# Altium PCB GUAU.PcbDoc
Units mm, origin at the board's own origin, x right, y up, seen from the top; angles counter-clockwise.
Board outline 40 x 20 mm, 4 copper layers (Top Layer, Int1 (GND), Int2 (PWR), Bottom Layer), stack 1.369 mm thick; 48 components, 39 nets, 223 pads, 212 vias.
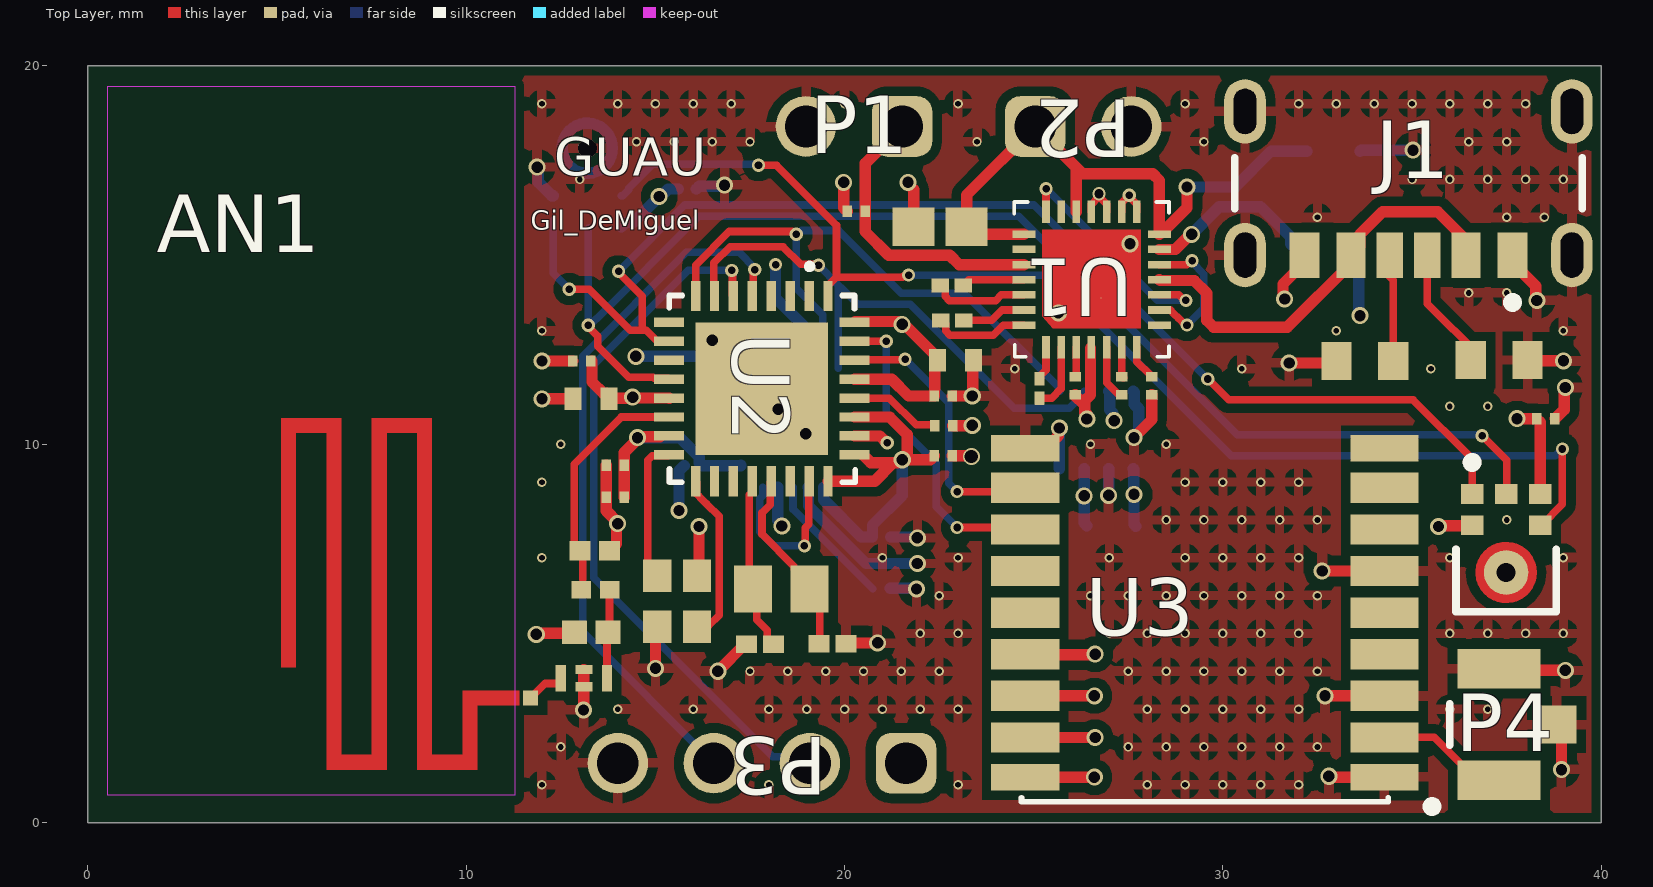
[diagram p0: Top Layer view]
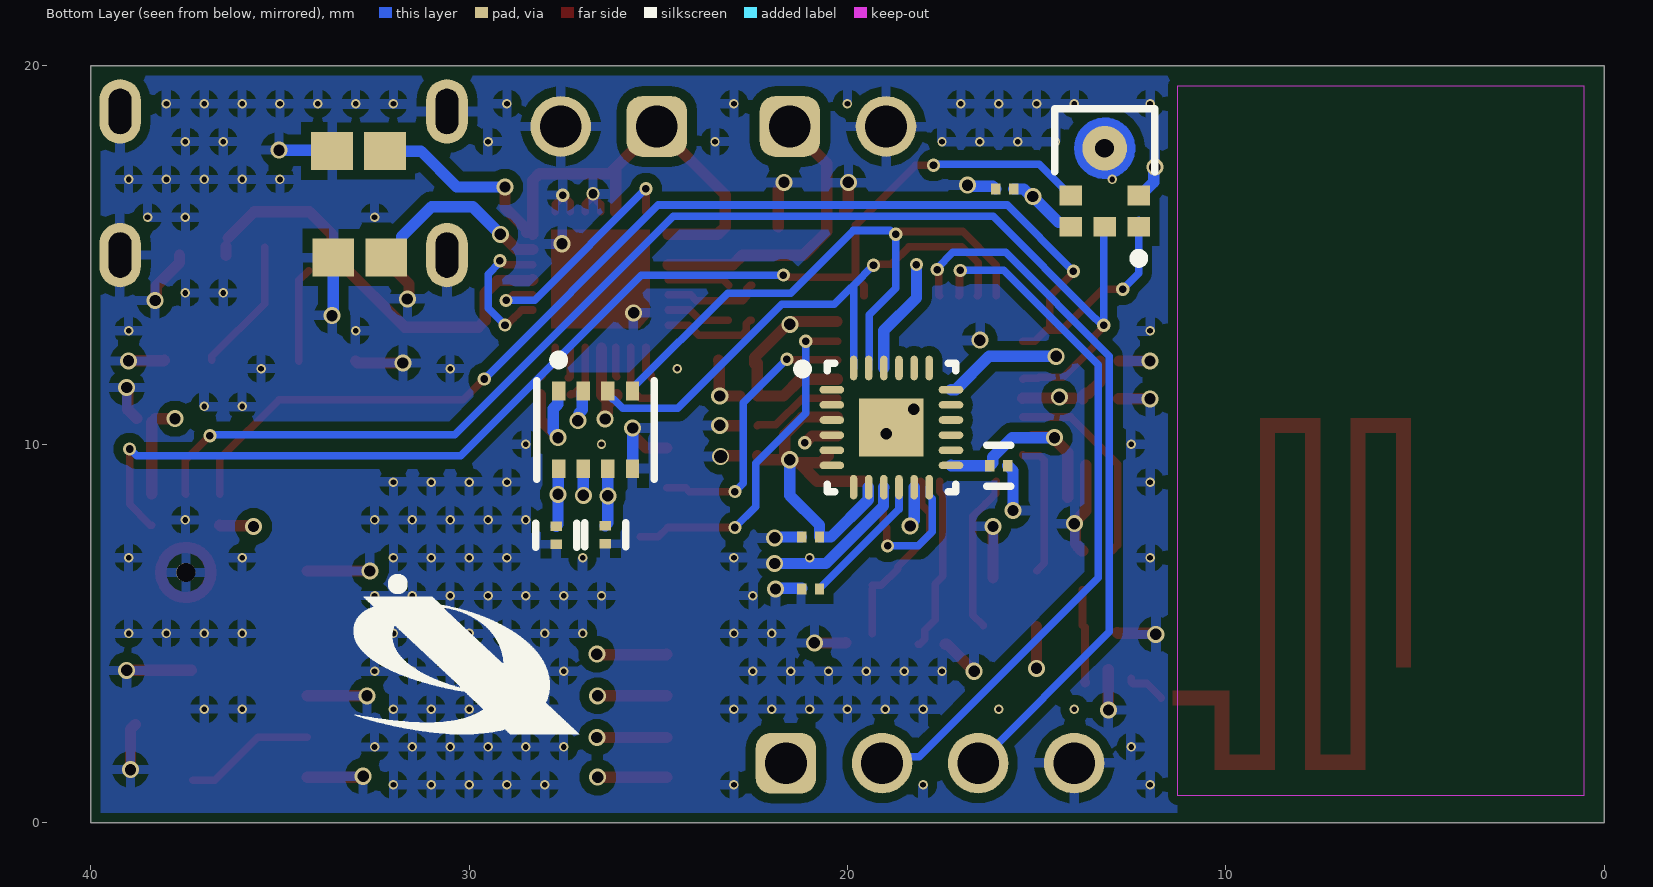
[diagram p1: Bottom Layer view, seen from below]
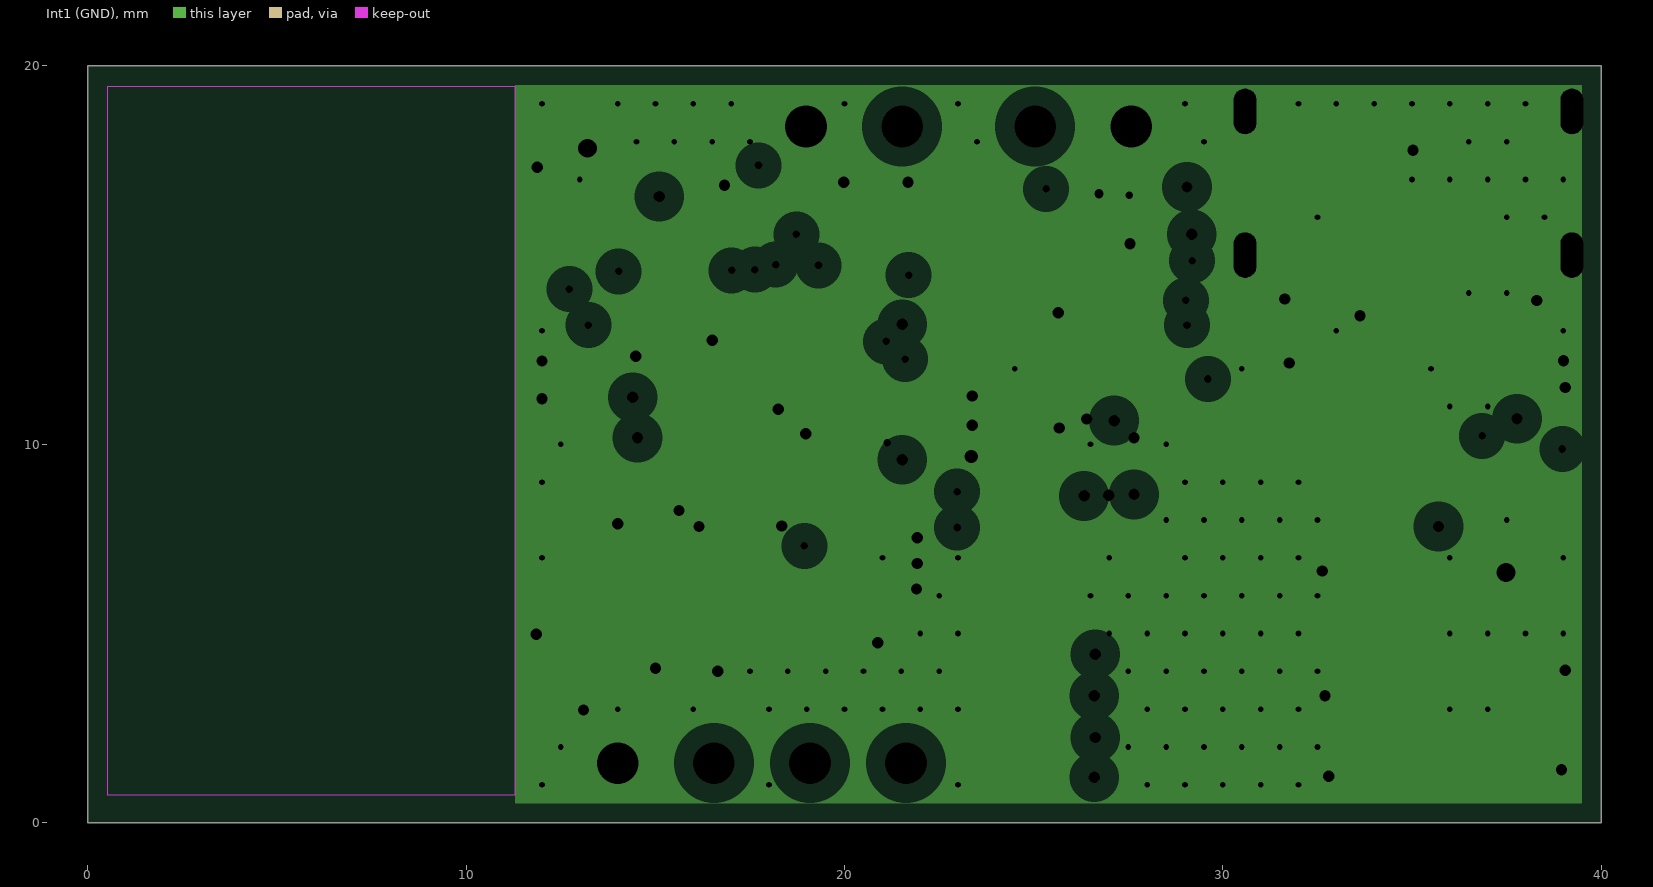
[diagram p2: Int1 (GND), clearances drawn from the general rule]
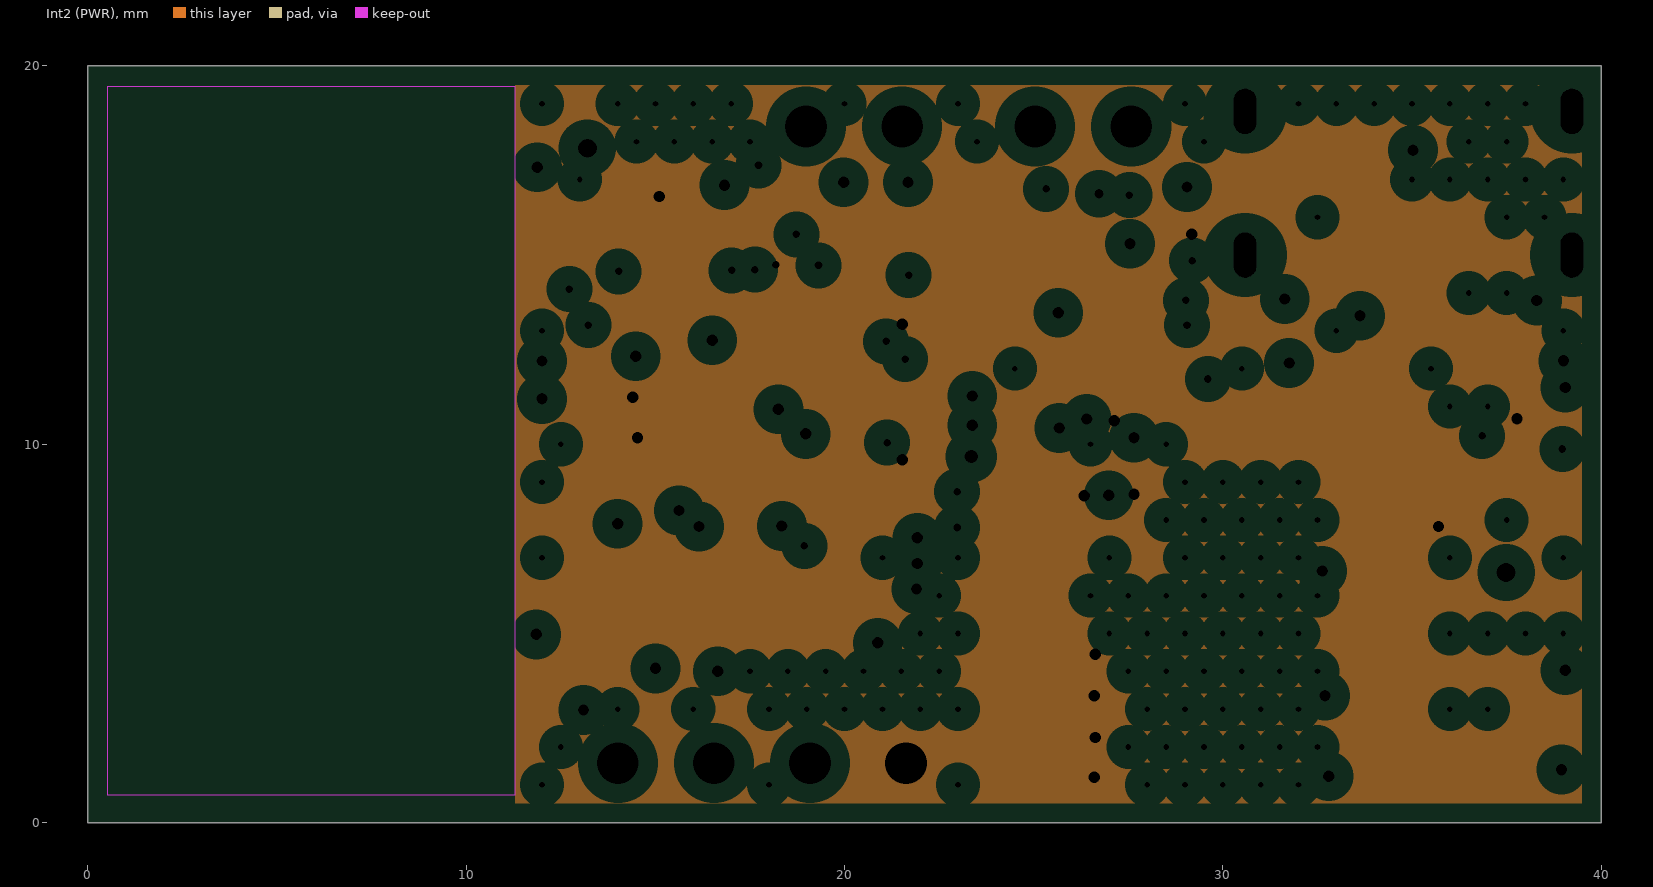
[diagram p3: Int2 (PWR), clearances drawn from the general rule]
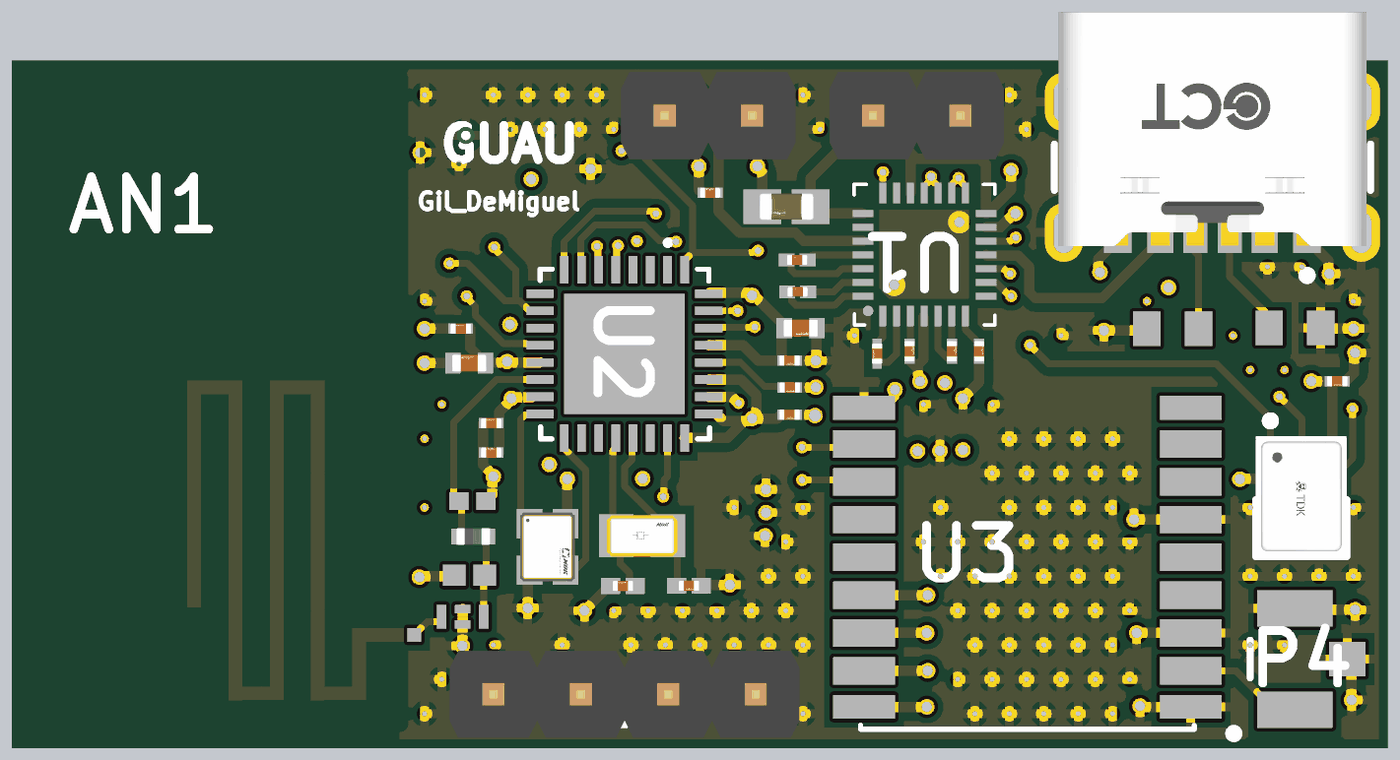
[diagram p4: 3D render of the assembled board from above, using the file's embedded part models]
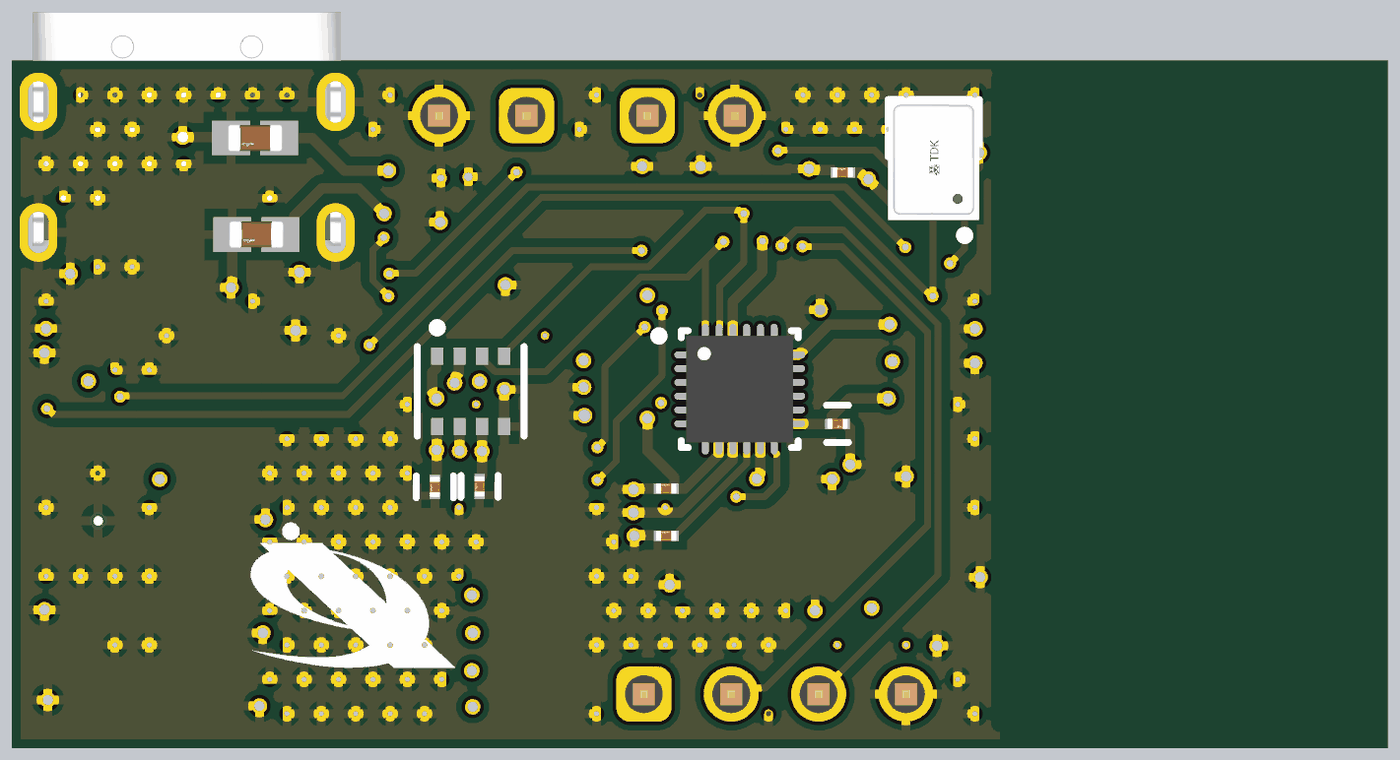
[diagram p5: 3D render of the assembled board from below, using the file's embedded part models]

## Layer stack, top to bottom
Top Solder: solder mask 0.0254, SM-001, Dk 4
Top Layer: signal copper 0.035
Dielectric 1: prepreg 0.1295, PP-017, Dk 4.3
Dielectric 2: prepreg 0.1295, PP-017, Dk 4.3
Int1 (GND): plane copper 0.035, net GND
Dielectric 3: core 0.7112, Core-039, Dk 4.8
Int2 (PWR): plane copper 0.035, net VDD
Dielectric 4: prepreg 0.1295, PP-017, Dk 4.3
Dielectric 5: prepreg 0.1295, PP-017, Dk 4.3
Bottom Layer: signal copper 0.035
Bottom Solder: solder mask 0.0254, SM-001, Dk 4

## Board outline
0,0 40,0 40,20 0,20

## Design rules (kind name [scope] priority, off if disabled: settings)
BoardOutlineClearance [All] p1: gap=0.254 ignorepadtopadclearanceinfootprint=FALSE except(0: Arc-SplitContinuation Track-SplitContinuation SMDPad-SplitContinuation THPad-SplitContinuation Via-SplitContinuation Fill-SplitContinuation Poly-SplitContinuation Region-SplitContinuation Text-SplitContinuation)
Clearance [All] p1: gap=0.254 ignorepadtopadclearanceinfootprint=FALSE except(0.1: Arc-Arc Arc-Track Arc-SMDPad Track-Track Track-SMDPad; 0.15: SMDPad-SMDPad; 0.2: Arc-Via Track-Via Via-Via; 0.28: Arc-THPad Track-THPad; 0.45: THPad-THPad)
HoleSize [All] p1: absolutevalues=TRUE maxlimit=6.3 minlimit=0.15 maxpercent=80.000 minpercent=20.000
HoleToHoleClearance [All] p1: gap=0.2 allowstackedmicrovias=TRUE
MinimumSolderMaskSliver [All] p1: minsoldermaskwidth=0.1
PlaneClearance [All] p1: clearance=0.508
PlaneConnect [All] p1: planeconnectstyle=Relief reliefexpansion=0.508 reliefentries=4 reliefconductorwidth=0.254 reliefairgap=0.254
PolygonConnect [All] p1: connectstyle=Relief reliefconductorwidth=0.254 reliefentries=4 polygonreliefangle="90 Angle" airgapwidth=0.254
RoutingVias [InNetClass('Supply')] p1: holewidth=0.3 width=0.45 viastyle="Through Hole" minholewidth=0.15 minwidth=0.25 maxholewidth=0.711 maxwidth=1.27
SilkToSolderMaskClearance [IsPad] p1: minsilkscreentomaskgap=0.15 clearancetoexposedcopper=TRUE
SolderMaskExpansion [All] p1: expansion=0.102 istentingtop=FALSE
SupplyNets "Schematic Supply Nets_4" [InNet('VDD')] p1: voltage=0.000
SupplyNets "Schematic Supply Nets_3" [InNet('3V7_BATT')] p2: voltage=0.000
SupplyNets "Schematic Supply Nets_2" [InNet('5V_USB')] p3: voltage=0.000
SupplyNets "Schematic Supply Nets_1" [InNet('2V4_PVCell')] p4: voltage=0.000
SupplyNets "Schematic Supply Nets" [InNet('GND')] p5: voltage=0.000
Width [InNetClass('Supply')] p1: maxlimit=0.4 minlimit=0.16 preferedwidth=0.3 minimp=50.000000 maximp=50.000000 favimp=50.000000
24 further rules are at their usual default settings.

## Classes and differential pairs
net class Supply: 2V4_PVCell 3V7_BATT 5V_USB GND VDD
component class U_Power: J1 P1 P2 U1
component class U_MCU: AN1 P3 U2
component class U_GNSS: P4 U3

## Components (designator, comment, footprint, x,y, rotation, side; value= is the part's Value field where it differs from the comment)
AN1 "AN5129" AN5129 11.4,0.594 r90 top
C1 "100n" FP-GRM033-0_03-MFG 20.305,16.156 r180 top
C2 "47u" FP-GRM188-0_2-IPC_B 22.524,15.75 r180 top
C3 "1u" FP-GRM033-0_05-e01_0_2-IPC_B 22.831,14.2 r180 top
C4 "1u" FP-GRM033-0_05-e01_0_2-IPC_B 22.844,13.274 r180 top
C5 "470n" FP-GRM033-0_03-IPC_C 25.157,11.476 r270 top
C6 "100n" FP-GRM033-0_03-MFG 27.329,11.545 r90 top
C7 "100n" FP-GRM033-0_03-MFG 26.099,11.545 r90 top
C8 "100n" FP-GRM033-0_03-MFG 28.123,11.545 r90 top
C9 "47u" FP-GRM188-0_2-IPC_B 32.889,14.94 r0 bottom
C10 "47u" FP-GRM188-0_2-IPC_B 32.925,17.75 r0 bottom
C11 "4.7u" FP-GRM155-0_15-MFG 13.3,11.2 r180 top
C12 "100n" FP-GRM033-0_03-MFG 13.05,12.2 r180 top
C13 "100n" FP-GRM033-0_03-MFG 13.938,8.6 r180 top
C14 "100n" FP-GRM033-0_03-MFG 13.938,9.45 r180 top
C15 "100n" FP-GRM033-0_03-MFG 22.612,9.7 r0 top
C16 "100n" FP-GRM033-0_03-MFG 22.612,11.275 r0 top
C17 "100n" FP-GRM033-0_03-MFG 22.616,10.491 r0 top
C21 "0.8p" CAPC1005X55X25LL05T10 13.394,7.184 r180 top
C22 "0.3p" CAPC1005X55X25NL05T10 13.303,5.026 r0 top
C25 "10p" FP-GRM033-0_03-IPC_A 19.684,4.725 r0 top
C26 "10p" FP-GRM033-0_03-IPC_A 17.767,4.718 r180 top
C27 "4.7u" FP-GRM155-0_15-MFG 22.933,12.219 r0 top
C31 "100n" FP-GRM033-0_03-MFG 27.7,7.6 r270 bottom
C32 "100n" FP-GRM033-0_03-MFG 26.4,7.612 r270 bottom
C33 "100n" FP-GRM033-0_03-MFG 20.975,7.55 r0 bottom
C34 "100n" FP-GRM033-0_03-MFG 15.996,9.433 r180 bottom
C35 "100n" FP-GRM033-0_03-MFG 20.975,6.175 r0 bottom
C36 "100n" FP-GRM033-0_03-MFG 15.841,16.75 r0 bottom
C37 "100n" FP-GRM033-0_03-MFG 38.534,10.672 r0 top
FLT1 "DFL162500LT-5028A1" PCBComponent_1 13.107,3.821 r180 top
J1 "USB4125-GF-A-0190" FP-USB4125-GF-A-0190-MFG 34.905,18 r180 top
L1 "2.7n" FP-LQG15HH_02-IPC_C 13.418,6.155 r0 top
P1 "61300211121" 61300211121 20.25,18.4 r180 top
P2 "61300211121" 61300211121 26.308,18.4 r0 top
P3 "61300411121" 61300411121 17.815,1.57 r180 top
P4 "U.FL-R-SMT-1(01)" HRS-U.FL-R-SMT-3_V 37.3,2.591 r90 top
R1 "5.1k" RESC1608X55X25ML10T15 37.304,12.224 r0 top
R2 "5.1k" RESC1608X55X25ML10T15 33.75,12.2 r180 top
U1 "PMIC" HVQFN-28 25.325,12.565 r90 top
U2 "STM32WB05xZ" STM32WB05XZ 19.561,13.921 r270 top
U3 "MAX-8" "MAX-8 LCC18" 24.775,9.95 r0 top
U4 "BME280" FP-BME280-MFG 26.657,10.379 r90 bottom
U5 "ICM-20948" TDK-QFN-24_L 18.837,10.441 r180 bottom
U6A "ICS-43434" FP-ICS-43434-MFG 37.487,7.321 r270 top
U6B "ICS-43434" FP-ICS-43434-MFG 13.2,17.115 r90 bottom
Y1 "NX2016SA-32MHZ-EXS00A-CS06654" FP-NX2016SA-MFG 15.575,5.85 r270 top
Y2 "NX2012SA-32.768K-STD-MUB-1" FP-NX2012SA-MFG 18.325,6.175 r180 top

## Footprints (in the part's own frame and the unit in brackets; to place one, negate y for a bottom-side part, rotate by r counter-clockwise, add the part's x,y. Pads: shape width x height; smd on the part's side, far side on the other; paste and mask are expansions set on the pad)
61300211121 [mm] "Pin Header, pitch 2.54 mm, THT, Vertical, single row, 2p"
  rrect50% 1.6x1.6 hole 1.1: 1(-1.27,0)
  round 1.6 hole 1.1: 2(1.27,0)
  body extent -2.54,-1.27 2.54,1.27, height 8.57
61300411121 [mm] "Pin Header, pitch 2.54 mm, THT, Vertical, single row, 4p"
  rrect50% 1.6x1.6 hole 1.1: 1(-3.81,0)
  round 1.6 hole 1.1: 2(-1.27,0) 3(1.27,0) 4(3.81,0)
  body extent -5.08,-1.27 5.08,1.27, height 8.57
AN5129 [mm]
  rect 0.4x0.4 smd: 1(2.7,-0.3)
  Top Layer region: 3.5,5.899 10.1,5.899 10.1,6.299 3.5,6.299
  Top Layer region: 9.7,4.7 10.1,4.7 10.1,6.3 9.7,6.3
  Top Layer region: 0.799,4.7 10.099,4.7 10.099,5.1 0.799,5.1
  Top Layer region: 0.8,3.5 1.2,3.5 1.2,5.1 0.8,5.1
  Top Layer region: 0.8,3.499 10.1,3.499 10.1,3.899 0.8,3.899
  Top Layer region: 9.7,2.3 10.1,2.3 10.1,3.9 9.7,3.9
  Top Layer region: 0.799,2.3 10.099,2.3 10.099,2.7 0.799,2.7
  Top Layer region: 0.8,1.1 1.2,1.1 1.2,2.7 0.8,2.7
  Top Layer region: 0.8,1.1 2.9,1.1 2.9,1.5 0.8,1.5
  Top Layer region: 2.499,-0.001 2.899,-0.001 2.899,1.499 2.499,1.499
  Keep-Out Layer region: 0.125,10.875 18.875,10.875 18.875,0.125 0.125,0.125
CAPC1005X55X25LL05T10 [mm] "Chip Capacitor, 2-Leads, Body 1.00x0.50mm, IPC High Density"
  rect 0.56x0.52 smd: 1(-0.39,0) 2(0.39,0)
  body extent -0.53,-0.28 0.53,0.28, height 0.55
CAPC1005X55X25NL05T10 [mm] "Chip Capacitor, 2-Leads, Body 1.00x0.50mm, IPC Medium Density"
  rect 0.66x0.62 smd: 1(-0.44,0) 2(0.44,0)
  body extent -0.53,-0.28 0.53,0.27, height 0.55
FP-BME280-MFG [mm]
  rect 0.5x0.35 smd paste+0 mask+0: 1(1.025,0.975) 2(1.025,0.325) 3(1.025,-0.325) 4(1.025,-0.975) 5(-1.025,-0.975) 6(-1.025,-0.325) 7(-1.025,0.325) 8(-1.025,0.975)
  silkscreen extent -1.3,-1.55 1.97,1.55
FP-GRM033-0_03-IPC_A [mm]
  rect 0.554x0.463 smd paste+0 mask+0: 1(-0.354,0) 2(0.354,0)
  body extent -0.83,-0.43 0.83,0.43, height 0.25
FP-GRM033-0_03-IPC_C [mm]
  rect 0.354x0.263 smd paste+0 mask+0: 1(-0.254,0) 2(0.254,0)
  body extent -0.53,-0.27 0.53,0.27, height 0.25
FP-GRM033-0_03-MFG [mm]
  rect 0.25x0.3 smd paste+0 mask+0: 1(-0.238,0) 2(0.238,0)
  body extent -0.46,-0.27 0.46,0.27, height 0.25
FP-GRM033-0_05-e01_0_2-IPC_B [mm]
  rect 0.461x0.372 smd paste+0 mask+0: 1(-0.306,0) 2(0.306,0)
  body extent -0.69,-0.34 0.69,0.34, height 0.25
FP-GRM155-0_15-MFG [mm]
  rect 0.45x0.6 smd paste+0 mask+0: 1(-0.475,0) 2(0.475,0)
  body extent -0.8,-0.43 0.8,0.43, height 0.25
FP-GRM188-0_2-IPC_B [mm]
  rect 1.105x1.006 smd paste+0 mask+0: 1(-0.701,0) 2(0.701,0)
  body extent -0.8,-0.4 0.8,0.4, height 1
FP-ICS-43434-MFG [mm]
  rect 0.522x0.6 smd paste-1000 mask+0: 1(-1.364,-0.9) 2(-0.542,-0.9) 4(-0.542,0.9) 5(-1.364,0.9) 6(-1.364,0)
  round 1.178 smd paste-1000 mask-1000: 3(0.71,0)
  round 0.5 hole 0.5 unplated paste-2539.97 mask+0: ""(0.71,0)
  Top Layer circle w0.3: c0.71,0 r0.663
  silkscreen extent -2.32,-1.33 1.75,1.33, body extent -1.75,-1.33 1.75,1.33, height 0.98
FP-LQG15HH_02-IPC_C [mm]
  rect 0.515x0.472 smd paste+0 mask+0: 1(-0.379,0) 2(0.379,0)
  body extent -0.74,-0.38 0.74,0.38, height 0.25
FP-NX2012SA-MFG [mm]
  rect 1x1.25 smd paste+0 mask+0: 1(-0.75,0) 2(0.75,0)
  body extent -1.35,-0.72 1.35,0.72, height 0.25
FP-NX2016SA-MFG [mm]
  rect 0.85x0.75 smd paste+0 mask+0: 1(-0.675,-0.525) 2(0.675,-0.525) 3(0.675,0.525) 4(-0.675,0.525)
  body extent -1.2,-1 1.2,1, height 0.25
FP-USB4125-GF-A-0190-MFG [mm]
  rrect100% 1.1x1.7 hole 1.2 slot 0.6 at 0 deg paste-2539.97 mask+0: 1(-4.32,3) 2(4.32,3) 3(-4.32,-0.8) 4(4.32,-0.8)
  rect 0.7x1.2 smd paste+0 mask+0: A5(-0.5,3) B5(0.5,3)
  rect 0.76x1.2 smd paste+0 mask+0: A9(1.52,3) B9(-1.52,3)
  rect 0.8x1.2 smd paste+0 mask+0: A12(2.75,3) B12(-2.75,3)
  silkscreen extent -4.59,0.43 4.59,4.37, body extent -4.97,-3.57 4.97,3.95, height 0.25
HRS-U.FL-R-SMT-3_V [mm] "SMT, 3-Leads, Body 2.6x2.6mm"
  rect 1.05x2.2 smd: 1(-1.475,0) 2(1.475,0)
  rect 1x1.05 smd: 3(0,-1.525)
  silkscreen extent -2.29,1.3 0.55,1.9, body extent -1.3,-1.3 1.3,1.3, height 1.25
HVQFN-28 [mm]
  rect 0.6x0.2 smd mask-2539.97: 1(0,0) 2(0,-0.4) 3(0,-0.8) 4(0,-1.2) 5(0,-1.6) 6(0,-2) 7(0,-2.4) 15(3.581,-2.4) 16(3.581,-2) 17(3.581,-1.6) 18(3.581,-1.2) 19(3.581,-0.8) 20(3.581,-0.4) 21(3.581,0)
  rect 0.2x0.6 smd mask-2539.97: 8(0.584,-2.997) 9(0.984,-2.997) 10(1.384,-2.997) 11(1.784,-2.997) 12(2.184,-2.997) 13(2.584,-2.997) 14(2.984,-2.997) 22(2.984,0.584) 23(2.584,0.584) 24(2.184,0.584) 25(1.784,0.584) 26(1.384,0.584) 27(0.984,0.584) 28(0.584,0.584)
  round 0.025 smd mask+0.2: 29(1.3,-1.45)
  Top Layer region: 0.508,-0.178 0.5,-0.175 0.817,0.106 3.104,0.106 3.104,-2.496 3.1,-2.5 0.5,-2.5
  silkscreen extent -0.25,-3.25 3.84,0.84, body extent -0.21,-3.2 3.78,0.79, height 0.8
"MAX-8 LCC18" [mm]
  rect 1.8x0.7 smd: 1(0,-0.05) 9(0,-8.75) 10(9.5,-8.75) 18(9.5,-0.05)
  rect 1.8x0.8 smd: 2(0,-1.1) 3(0,-2.2) 4(0,-3.3) 5(0,-4.4) 6(0,-5.5) 7(0,-6.6) 8(0,-7.7) 11(9.5,-7.7) 12(9.5,-6.6) 13(9.5,-5.5) 14(9.5,-4.4) 15(9.5,-3.3) 16(9.5,-2.2) 17(9.5,-1.1)
  silkscreen extent -0.1,-9.4 9.6,-9.29, body extent -0.18,-9.4 9.68,0.6, height 2.06
PCBComponent_1 [mm]
  rect 0.275x0.7 smd: 1(-0.613,0) 3(0.613,0)
  rect 0.45x0.245 smd: 2(0,0.228) 4(0,-0.228)
  body extent -0.8,-0.41 0.8,0.41, height 0.36
RESC1608X55X25ML10T15 [mm] "Chip Resistor, 2-Leads, Body 1.60x0.80mm, IPC Low Density"
  rect 0.8x1 smd: 1(-0.75,0) 2(0.75,0)
  body extent -0.85,-0.45 0.85,0.45, height 0.55
STM32WB05XZ [mm]
  rect 0.8x0.25 smd: 1(0,0) 2(0,-0.5) 3(0,-1) 4(0,-1.5) 5(0,-2) 6(0,-2.5) 7(0,-3) 8(0,-3.5) 17(4.9,-3.5) 18(4.9,-3) 19(4.9,-2.5) 20(4.9,-2) 21(4.9,-1.5) 22(4.9,-1) 23(4.9,-0.5) 24(4.9,0)
  rect 0.25x0.8 smd: 9(0.7,-4.2) 10(1.2,-4.2) 11(1.7,-4.2) 12(2.2,-4.2) 13(2.7,-4.2) 14(3.2,-4.2) 15(3.7,-4.2) 16(4.2,-4.2) 25(4.2,0.7) 26(3.7,0.7) 27(3.2,0.7) 28(2.7,0.7) 29(2.2,0.7) 30(1.7,0.7) 31(1.2,0.7) 32(0.7,0.7)
  rect 3.5x3.5 smd: 33(2.45,-1.751)
  silkscreen extent -0.8,-4.2 4.92,0.72, body extent -0.5,-4.7 5.4,1.2, height 0.9
TDK-QFN-24_L [mm] "QFN, 24-Leads, Body 3.10x3.10mm, Pitch 0.40mm, Thermal Pad 1.70x1.54mm, IPC High Density"
  oval 0.65x0.2 smd: 1(-1.575,1) 2(-1.575,0.6) 3(-1.575,0.2) 4(-1.575,-0.2) 5(-1.575,-0.6) 6(-1.575,-1) 13(1.575,-1) 14(1.575,-0.6) 15(1.575,-0.2) 16(1.575,0.2) 17(1.575,0.6) 18(1.575,1)
  oval 0.2x0.65 smd: 7(-1,-1.575) 8(-0.6,-1.575) 9(-0.2,-1.575) 10(0.2,-1.575) 11(0.6,-1.575) 12(1,-1.575) 19(1,1.575) 20(0.6,1.575) 21(0.2,1.575) 22(-0.2,1.575) 23(-0.6,1.575) 24(-1,1.575)
  rect 1.7x1.54 smd: 25(0,0)
  silkscreen extent -2.48,-1.7 1.7,1.7, body extent -1.55,-1.55 1.55,1.55, height 1.05

## Part data
C1 C6 C7 C8 C12 C13 C14 C15 C16 C17 C31 C32 C33 C34 C35 C36 C37: library part CMP-06035-019037-1, "Chip Multilayer Ceramic Capacitors for General Purpose, 0201, 0.10uF, X7S, 22%, 10%, 16V", Capacitance=100nF, Case Code (Imperial)=0201, Case Code (Metric)=0603, Dielectric=X7S, Max Operating Temperature=125°C, Min Operating Temperature=-55°C, Package Quantity=15000, Tolerance=10%, Voltage Rating=16V, Case/Package=0201, Height=0.3mm, Length=0.024inch, Mount="Surface Mount", Packaging="Tape and Reel", Termination=SMD/SMT, Thickness=0.013inch, Voltage Rating (DC)=16V, Weight=1.2E-05oz, Width=0.3mm
C2 C9 C10: library part CMP-2000-05444-2, "Chip Multilayer Ceramic Capacitors for General Purpose, 0603, 47uF, X5R, 15%, 20%, 6.3V", Capacitance=47uF, Case Code (Imperial)=0603, Case Code (Metric)=1608, Dielectric=X5R, Max Operating Temperature=85°C, Min Operating Temperature=-55°C, Tolerance=20%, Voltage Rating=6.3V, Case/Package=0603, Length=0.063inch, Mount="Surface Mount", Packaging="Tape and Reel", Thickness=0.039inch, Voltage Rating (DC)=6.3V, Width=0.031inch
C3 C4: library part CMP-06035-049033-1, "Chip Multilayer Ceramic Capacitors for General Purpose, 0201, 1.0uF, X5R, 15%, 20%, 6.3V", Capacitance=1uF, Case Code (Imperial)=0201, Case Code (Metric)=0603, Dielectric=X5R, Max Operating Temperature=85°C, Min Operating Temperature=-55°C, Package Quantity=1, Tolerance=20%, Voltage=6.3V, Case/Package=0201, Depth=0.3mm, Height=0.3mm, Lead Free="Lead Free", Length=0.6mm, Mount="Surface Mount", Packaging="Cut Tape", REACH SVHC="No SVHC", Termination=SMD/SMT, Thickness=300um, Voltage Rating=6.3V, Voltage Rating (DC)=6.3V, Weight=1.2E-05oz, Width=0.3mm
C5: library part CMP-06035-010465-1, "Chip Multilayer Ceramic Capacitors for General Purpose, 0201, 0.47uF, X5R, 15%, 10%, 6.3V", Capacitance=470nF, Case Code (Imperial)=0201, Case Code (Metric)=0603, Dielectric=X5R, Max Operating Temperature=85°C, Min Operating Temperature=-55°C, Package Quantity=15000, Tolerance=10%, Voltage Rating=6.3V, Case/Package=0201, Depth=0.3mm, Height=0.3mm, Lead Free="Lead Free", Length=0.6mm, Mount="Surface Mount", Packaging="Tape and Reel", Termination=SMD/SMT, Thickness=0.013inch, Voltage Rating (DC)=6.3V, Weight=1.2E-05oz, Width=0.012inch
C11 C27: library part CMP-06035-003573-1, "Chip Multilayer Ceramic Capacitors for General Purpose, 0402, 4.7uF, X5R, 15%, 20%, 10V", Capacitance=4.7uF, Case Code (Imperial)=0402, Case Code (Metric)=1005, Max Operating Temperature=85°C, Min Operating Temperature=-55°C, Tolerance=20%, Voltage Rating=10V, Case/Package=0402, Mount="Surface Mount", Packaging="Tape and Reel"
C21: library part CMP-1034-00043-2, Manufacturer=Murata, Part Number=GRM1555C1HR80BA01D
C22: library part CMP-1034-00007-2, Manufacturer=Murata, Part Number=GRM1555C1HR30WA01D
C25 C26: library part CMP-2010-01302-2, "Chip Multilayer Ceramic Capacitors for General Purpose, 0201, 10pF, C0G, 30ppm/°C, 5%, 25V", Capacitance=10pF, Case Code (Imperial)=0201, Case Code (Metric)=0603, Dielectric=C0G, Max Operating Temperature=125°C, Min Operating Temperature=-55°C, Package Quantity=1, Tolerance=5%, Voltage Rating=25V, Case/Package=0201, Depth=0.3mm, Lead Free="Lead Free", Length=0.024inch, Mount="Surface Mount", Packaging="Tape and Reel", REACH SVHC="No SVHC", Series=GRM, Termination=SMD/SMT, Thickness=0.013inch, Voltage Rating (DC)=25V, Width=0.012inch
J1: library part CMP-245163-000004-1, "CONN RCPT TYPE C 6P SMD RA"
L1: library part CMP-2000-06580-2, "Multilayer type RF Inductor 2.7nH ±0.3nH 0.12Ω 800mA 0402", Case Code (Imperial)=0402, Case Code (Metric)=1005, Current Rating=300mA, DC Resistance (DCR)=150mR, Inductance=2.7nH, Max Operating Temperature=125°C, Min Operating Temperature=-55°C, Package Quantity=10000, Self Resonant Frequency=6GHz, Test Frequency=100MHz, Case/Package=0402, Core Material=Air, DC Current=300mA, Depth=0.55mm, Height=0.5mm, Height - Seated (Max)=0.022inch, Lead Free="Lead Free", Length=1mm, Max DC Current=300mA, Military Standard=Not, Mount="Surface Mount", Packaging="Tape and Reel", Q Factor=8, Radiation Hardening=No, Shielding=Unshielded, Termination=SMD/SMT, Width=0.5mm
P1 P2: library part CMP-1712-00002-6, Color=Black, Contact Resistance=20mΩ, Current Rating=3A, Max Operating Temperature=125°C, Min Operating Temperature=-40°C, Operating Supply Voltage=250V, Connector Type="Male Pin", Contact Gender=Male, Contact Material=Copper, Contact Mating Length=5.9944mm, Contact Plating=Gold, Gender=Male, Height=8.94mm, Housing Material=PBT, Lead Free="Lead Free", Lead Pitch=2.54mm, Mount="Through Hole", NexarPartId=20081794, Number of Contacts=2, Number of Pins=2, Number of Positions=2, Number of Rows=1, Orientation=Vertical, Packaging=Bulk, Pitch=2.54mm, REACH SVHC="No SVHC", RoHS=Compliant, Termination="Through Hole", Voltage Rating=250V
P3: library part CMP-1502-01064-3, Color=Black, Contact Resistance=20mΩ, Current Rating=3A, Max Operating Temperature=105°C, Min Operating Temperature=-40°C, Operating Supply Voltage=250V, Connector Type="Male Pin", Contact Material=Copper, Contact Mating Length=5.9944mm, Contact Plating=Gold, Gender=Male, Height=8.89mm, Lead Free="Lead Free", Lead Pitch=2.54mm, Mount="Through Hole", NexarPartId=32855522, Number of Contacts=4, Number of Pins=4, Number of Positions=4, Number of Rows=1, Orientation=Vertical, Packaging=Bulk, Pitch=2.54mm, REACH SVHC=Unknown, RoHS=Compliant, Termination=Solder, Voltage Rating=250V
P4: library part CMP-2000-05153-1, "Ultra Small Coaxial Connector, 6 GHz, -40 to 90 degC, 3-Pin SMD, RoHS, Bulk", Dielectric Material=LiquidCrystalPolymer(LCP), Frequency - Max=6GHz, Housing Color=Silver, Manufacturer="Hirose Electric", Operating Temperature=-40degC~90degC, Package Description="3-Pin Surface Mount Device, Body 2.6 x 2.6 mm", Package Reference=U.FL-R-SMT, Standard Package=100, Body Finish=Silver, Body Material=PhosphorBronze, Category=Connectors,Interconnects, Center Contact Material=PhosphorBronze, Center Contact Plating=Gold, Connector Style=U.FL, Connector Type=Jack,MalePin, Contact Termination=Solder, Datasheet URL=https://datasheet.ciiva.com/26945/getdatasheetpartid-475239-26945414.pdf, Datasheet Version=Feb-09, Dynamic Catalog=U.FLSeries, Family=CoaxialConnectors(RF), Fastening Type=Snap-On, Featured Product=HiroseU.FLSeries, Impedance=50Ohm, Manufacturer URL=https://www.hirose.com, Minimum Quantity=UltraMiniatureCoaxial, Mounting Type=SurfaceMount, Online Catalog=U.FLSeries, Other Names="H122041 / U.FL-R-SMT-1(01)-ND", Packaging=Bulk, Quantity Available=Bulk, Series=U.FL, Shield Termination=Solder, Unit PriceUSD=U.FL
R1 R2: library part CMP-2000-04091-1, Manufacturer=Yageo, Part Number=RC0603FR-075K1L
U1: library part NEH7100BU, "Power Management Specialised - PMIC Inductorless energy harvesting PMIC with battery protection, LDO and USB charging"
U4: library part CMP-2000-05073-3, "SENSOR PRESSURE HUMIDITY TEMP", Case/Package=LGA, Max Operating Temperature=85°C, Min Operating Temperature=-40°C, Accuracy=3%, Lead Free="Lead Free", Mount="Surface Mount", Number of Pins=8, Output Type=SPI, Packaging="Cut Tape", Response Time=1s, Sensor Type=Temperature
U5: library part CMP-2000-07532-1, "World’s Lowest Power 9-Axis MEMS MotionTracking(TM) Device, 1.71 to 3.6 V, -40 to 85 degC, 24-Pin QFN, RoHS, Tape and Reel", Manufacturer=TDK, Package Description="24-Pin Quad Flat No-lead Package, Body 3 x 3 mm, Pitch 0.4 mm", Package Reference=QFN-24, Datasheet URL=https://www.invensense.com/wp-content/uploads/2016/06/DS-000189-ICM-20948-v1.3.pdf, Datasheet Version="Rev. 1.3, 06/2017", Manufacturer URL=http://www.tdk.com/, Mounting Technology=SurfaceMount
U6A U6B: library part CMP-03292-71346757-1, "ICS-43434 Mic Omni-Directional -26dB 3.63V Rectangular Solder Pad T/R", Max Operating Temperature=85°C, Max Supply Voltage=3.63V, Min Operating Temperature=-40°C, Min Supply Voltage=1.65V, Operating Supply Current=550µA, Direction=Omnidirectional, Height=980µm, Length=3.5mm, Lifecycle Status=Production, Max Length=3.6mm, Max Thickness=1.08mm, Max Width=2.75mm, Min Length=3.4mm, Min Thickness=880µm, Min Width=2.55mm, NexarPartId=71346757, Output Type=Digital, RoHS=Compliant, Schedule B=8518100000, Width=2.65mm
Y1: library part CMP-200220-000017-1, "CRYSTAL 32.0000MHZ 8PF SMD", Case/Package=SMD/SMT, ESR (Equivalent Series Resistance)=60R, Frequency=32MHz, Load Capacitance=8pF, Max Operating Temperature=125°C, Min Operating Temperature=-40°C, Ratings=AEC-Q200, Mount="Surface Mount", Packaging="Tape and Reel"
Y2: library part CMP-200220-000019-1, "CRYSTAL 32.7680KHZ 12.5PF SMD", Case/Package=SMD/SMT, ESR (Equivalent Series Resistance)=80kR, Frequency=32.768kHz, Frequency Tolerance=20ppm, Load Capacitance=12.5pF, Max Operating Temperature=85°C, Min Operating Temperature=-40°C, Height=0.024inch, Length=0.081inch, Mount="Surface Mount", Packaging="Cut Tape", RoHS Compliant=Yes, Series=NX2012SA, Width=0.047inch

## Via types
v1: diameter 0.25, hole 0.15, Top Layer to Bottom Layer, 128 vias
v2: diameter 0.45, hole 0.3, Top Layer to Bottom Layer, 58 vias
v3: diameter 0.35, hole 0.2, Top Layer to Bottom Layer, 24 vias
v4: diameter 0.35, hole 0.25, Top Layer to Bottom Layer, 1 vias
v5: diameter 0.45, hole 0.35, Top Layer to Bottom Layer, 1 vias

## Nets (pads, with @x,y where several pads share a name; then routed paths per layer and width w, separated by ;. In a path a pad name is that pad's centre, name@x,y a point inside that pad or via, vN(x,y) a via of type N, cw(c..) or ccw(c..) an arc to the next point about the centre after c; other vN are vias at no path point)
2V4_PVCell: C1.1 P1.1 U1.24 | length 7.8
  Top Layer w0.2: P1.1@21.52,18.307 P1.1
  Top Layer w0.3: P1.1 20.55,17.43 20.55,16.686 20.542,16.679 C1.1 20.542,15.622 21.168,14.997 22.781,14.997 23.028,14.75 U1.24
3V7_BATT: C2.1 C10.1 P2.1 U1.14 U1.19 U1.22 | length 16.5
  Top Layer w0.3: U1.22 23.425,15.55 C2.1 23.225,16.587 P2.1 26.125,17.313 ; U1.19 26.125,17.313 ; U1.14 28.322,16.974 28.146,17.15 26.288,17.15 26.125,17.313 ; U1.14@28.472,15.6 28.472,15.672 29.05,16.25 v2(29.05,16.8)
  Bottom Layer w0.3: v2(29.05,16.8) 30.324,16.8 31.274,17.75 C10.1
5V_USB: J1.A9 J1.B9 U1.11 | length 10.9
  Top Layer w0.3: U1.11 28.344,14.328 29.24,14.328 29.576,13.992 29.576,13.271 29.752,13.096 31.701,13.096 J1.A9@33.396,14.791 ; J1.A9 33.615,15.23 33.615,15.54 34.225,16.15 35.675,16.15 J1.B9@36.371,15.454 ; J1.B9 J1.B9@36.425,15.22
GND: C1.2 C2.2 C7.1 C8.1 C9.2 C10.2 C11.2 C12.2 C13.2 C14.2 C15.2 C16.2 C17.2 C21.1 C22.1 C25.2 C26.2 C27.2 C31.2 C32.2 C33.2 C34.2 C35.2 C36.2 C37.2 FLT1.2 FLT1.4 J1.1 J1.2 J1.3 J1.4 J1.A12 J1.B12 P1.2 P2.2 P3.4 P4.2 P4.3 R1.2 R2.2 U1.4 U1.15 U1.16 U1.17 U1.18 U1.29 U2.26 U2.33 U3.1 U3.10 U3.12 U3.15 U4.1 U4.5 U4.7 U5.9 U5.11 U5.18 U5.25 U6A. U6A.3 U6B. U6B.2 U6B.3 Y1.2 Y1.4 | length 55.6
  Top Layer w0.2: v2@16.15,7.757 v2(16.15,7.825) ; U1.18 26.525,16.347 26.533,16.347 26.696,16.51 v4@26.696,16.592 ; v4(26.725,16.621) 26.754,16.592 26.754,16.518 26.925,16.347 U1.17 ; U1.16 27.325,16.384 v3(27.525,16.584) 27.555,16.554 27.555,16.517 27.725,16.347 U1.15 ; P4.2 P4.2@37.341,4.025
  Top Layer w0.3: v2(11.85,4.975) 11.876,5.001 12.837,5.001 C22.1 ; v2(12,11.2) C11.2 ; v2(12,12.2) C12.2 ; v2(13.1,2.975) 13.104,2.979 13.104,3.59 FLT1.2 FLT1.4 ; C14.2 C13.2 13.7,8.241 14,7.941 v2(14,7.9) 13.971,7.871 13.971,7.372 13.914,7.314 13.914,7.294 13.804,7.184 C21.1 ; v2(15,4.075) Y1.2@15,5.181 ; Y1.4@16.15,6.474 v2@16.15,7.757 ; v2(16.65,4) 17.367,4.718 C26.2 ; v2(19.975,16.925) 19.975,16.248 C1.2 ; C25.2@20.048,4.75 20.049,4.749 20.874,4.749 v2(20.875,4.75) ; U2.26 20.934,10.221 21.114,10.041 v3(21.127,10.041) ; v2(21.675,16.925) 21.675,16.884 21.824,16.736 C2.2 ; C15.2 23.325,9.7 v5(23.35,9.675) ; C16.2 v2(23.375,11.275) 23.391,11.291 23.391,12.203 C27.2 ; C17.2 23.366,10.491 v2(23.375,10.5) ; U3.1 25.325,9.9 25.646,10.221 25.646,10.4 v2(25.675,10.429) ; C7.1 26.099,11.282 26.325,11.056 26.35,11.056 ; v2(26.402,10.669) 26.431,10.697 26.431,10.769 26.35,10.85 26.35,11.056 ; U1.4@26.499,12.539 26.499,11.303 26.35,11.154 26.35,11.056 ; v2(27.65,10.175) 27.65,10.183 28.123,10.656 C8.1 ; v2(31.633,13.842) 31.633,13.882 31.588,13.927 31.588,14.233 32.155,14.8 J1.A12 ; v2(31.75,12.15) 32.95,12.15 R2.2 ; v2(32.625,6.65) U3.15 ; v2(32.7,3.35) U3.12 ; v2(32.8,1.225) 32.825,1.2 U3.10 ; P4.2@37.341,4.025 v2(39.05,4.025) ; J1.B12 37.655,14.8 38.271,14.184 38.271,13.829 v2(38.3,13.8) ; R1.2 38.075,12.203 v2(39.004,12.203) ; C37.2@38.787,10.681 39.021,10.916 39.021,11.471 v2(39.05,11.5) ; P4.3 38.95,2.466 v2(38.95,1.4)
  Bottom Layer w0.3: v2(11.875,17.325) 11.904,17.296 11.904,16.93 12.261,16.573 U6B.2 ; v2(14.482,12.325) 16.253,12.325 17.137,11.441 U5.18 ; v2(15.625,8.25) 15.625,9.3 C34.2 ; C36.2 16.084,16.75 16.156,16.821 16.796,16.821 v2(16.825,16.85) ; U5.11 18.237,7.983 18.342,7.879 v2(18.342,7.838) ; U5.9 19.047,8.857 19.047,8.371 20.568,6.85 v2(21.925,6.85) ; C35.2@21.205,6.197 21.878,6.197 v2(21.9,6.175) ; C33.2 v2@21.9,7.55 ; v2(25.675,10.429) 25.679,10.425 25.679,9.358 U4.5 ; v2(26.982,8.651) U4.7 ; U4.1 27.657,11.379 27.657,11.056 27.775,10.938 27.775,10.341 27.65,10.216 v2(27.65,10.175) ; C9.2 33.59,13.365 v2(33.625,13.4) ; C10.2 33.651,17.775 v2(35.025,17.775)
  other v1: 12,1 18,1 23,1 28,1 29,1 30,1 31,1 32,1 12.5,2 27.5,2 28.5,2 29.5,2 30.5,2 31.5,2 32.5,2 14,3 16,3 18,3 19,3 20,3 21,3 22,3 23,3 28,3 29,3 30,3 31,3 32,3 36,3 37,3 17.5,4 18.5,4 19.5,4 20.5,4 21.5,4 22.5,4 27.5,4 28.5,4 29.5,4 30.5,4 31.5,4 32.5,4 22,5 23,5 27,5 28,5 29,5 30,5 31,5 32,5 36,5 37,5 38,5 39,5 22.5,6 26.5,6 27.5,6 28.5,6 29.5,6 30.5,6 31.5,6 32.5,6 12,7 21,7 23,7 27,7 29,7 30,7 31,7 32,7 36,7 39,7 28.5,8 29.5,8 30.5,8 31.5,8 32.5,8 37.5,8 12,9 29,9 30,9 31,9 32,9 12.5,10 26.5,10 28.5,10 36,11 37,11 24.5,12 30.5,12 35.5,12 12,13 33,13 39,13 36.5,14 37.5,14 32.5,16 37.5,16 38.5,16 13,17 35,17 36,17 37,17 38,17 39,17 14.5,18 15.5,18 16.5,18 17.5,18 23.5,18 29.5,18 36.5,18 37.5,18 12,19 14,19 15,19 16,19 17,19 20,19 23,19 29,19 32,19 33,19 34,19 35,19 36,19 37,19 38,19
  other v2: 21.925,7.525 18.975,10.275 18.25,10.925 16.5,12.75 25.65,13.475 27.546,15.3
NetAN1_1: AN1.1 FLT1.3 | length 1.1
  Top Layer w0.2: AN1.1 12.083,3.677 12.457,3.677 12.495,3.714 FLT1.3
NetC3_1: C3.1 U1.25 | length 1.7
  Top Layer w0.2: C3.1 23.286,14.35 U1.25
NetC3_2: C3.2 U1.26 | length 2.6
  Top Layer w0.2: C3.2 22.569,14.2 22.656,14.114 22.656,13.913 22.773,13.796 23.99,13.796 24.143,13.95 U1.26
NetC4_1: C4.1 U1.27 | length 1.7
  Top Layer w0.2: C4.1 23.892,13.274 24.168,13.55 U1.27
NetC4_2: C4.2 U1.28 | length 2.6
  Top Layer w0.2: C4.2 22.583,13.274 22.669,13.187 22.669,13.004 22.786,12.887 23.93,12.887 24.192,13.15 U1.28
NetC5_1: C5.1 U1.1 | length 0.9
  Top Layer w0.2: C5.1 25.188,11.762 25.188,11.827 25.325,11.964 U1.1
NetC5_2: C5.2 U1.2 | length 1.8
  Top Layer w0.2: C5.2 25.472,11.222 25.725,11.475 U1.2
NetC6_1: C6.1 U1.5 | length 1.5
  Top Layer w0.2: U1.5 26.925,11.628 27.221,11.332 27.304,11.332 C6.1 C6.1@27.304,11.307
NetC6_2: C6.2 U1.6 | length 0.9
  Top Layer w0.2: U1.6 27.325,11.786 C6.2@27.354,11.757 ; C6.2 C6.2@27.354,11.757 ; C6.2@27.379,11.757 C6.2@27.354,11.757
NetC7_2: C7.2 U1.3 | length 0.8
  Top Layer w0.2: C7.2@26.1,11.782 26.125,11.807 U1.3
NetC8_2: C8.2 U1.7 | length 1
  Top Layer w0.2: U1.7 27.725,12.181 28.073,11.832 28.073,11.807 28.098,11.782 C8.2
NetC17_1: C17.1 U2.28 | length 2.4
  Top Layer w0.2: U2.28 21.185,11.221 21.889,10.516 22.353,10.516 C17.1
NetC22_2: C22.2 FLT1.1 L1.2 | length 2.4
  Top Layer w0.2: FLT1.1 C22.2@13.72,5.161 ; C22.2@13.732,5.168 13.786,5.222 L1.2@13.786,6.155
  Top Layer w0.254: FLT1.1@13.712,3.702 FLT1.1@13.719,3.709
NetC35_1: C35.1 U5.10 | length 3.6
  Bottom Layer w0.2: U5.10 18.637,8.285 C35.1@20.743,6.18
NetJ1_A5: J1.A5 R1.1 | length 3.6
  Top Layer w0.2: J1.A5@35.4,15.206 35.4,13.721 36.8,12.321 R1.1@36.8,12.221
NetJ1_B5: J1.B5 R2.1 | length 2.5
  Top Layer w0.2: J1.B5@34.243,14.588 34.5,14.33 R2.1
NetP4_1: P4.1 U3.11 | length 3.5
  Top Layer w0.2: U3.11 35.591,2.25 36.725,1.116 P4.1
NetU1_9: U1.9 U1.12 | length 3.8
  Top Layer w0.2: U1.9 28.604,13.55 28.704,13.45 28.827,13.328 28.833,13.328 29.011,13.15 v3(29.051,13.15) ; U1.12 29.041,14.75 29.145,14.853 v3(29.185,14.853)
  Bottom Layer w0.2: v3(29.051,13.15) 29.498,13.597 29.498,14.5 29.185,14.812 v3(29.185,14.853)
NetU1_10: U1.10 U1.21 | length 6.3
  Top Layer w0.2: U1.21 v3@25.325,16.753 ; U1.10 28.836,13.95 28.982,13.803 v3(29.023,13.803)
  Bottom Layer w0.2: v3(25.326,16.754) 28.267,13.813 29.013,13.813 v3(29.023,13.803)
NetU2_16: U2.16 Y1.1 | length 3.6
  Top Layer w0.2: Y1.1@14.989,6.661 14.8,6.85 14.8,9.578 14.917,9.696 15.336,9.696 U2.16
NetU2_17: U2.17 Y1.3 | length 4.2
  Top Layer w0.2: U2.17 16.086,8.996 16.086,8.689 16.236,8.539 ; 16.236,8.538 16.353,8.421 16.682,8.093 16.682,5.485 Y1.3@16.407,5.21
NetU2_23: U2.23 U5.12 | length 4.3
  Top Layer w0.2: v3(18.938,7.313) 18.956,7.331 18.956,7.788 19.056,7.888 U2.23@19.056,9.001
  Bottom Layer w0.2: U5.12 17.837,8.641 17.753,8.556 17.753,7.685 18.125,7.313 v3(18.938,7.313)
NetU2_30: U2.30 U3.2 | length 7.3
  Top Layer w0.2: U2.30 20.276,12.235 21.585,12.235 v3(21.6,12.25) ; v3(22.975,8.75) 24.175,8.75 24.275,8.85 U3.2
  Bottom Layer w0.2: v3(21.6,12.25) 22.75,11.1 22.75,8.975 v3(22.975,8.75)
NetU2_31: U2.31 U3.3 | length 9.1
  Top Layer w0.2: U2.31 v3(21.1,12.721) ; v3(22.975,7.8) 24.75,7.8 24.996,7.554 U3.3@25.471,7.554
  Bottom Layer w0.2: v3(21.1,12.721) 21.1,10.825 22.425,9.5 22.425,8.35 v3(22.975,7.8)
RCC_OSCIN: C26.1 U2.20 Y2.2 | length 4.6
  Top Layer w0.2: U2.20 17.561,8.746 17.478,8.662 17.478,6.513 17.683,6.308 17.683,5.367 17.96,5.09 17.96,4.849 18.092,4.718 C26.1
RCC_OSCOUT: C25.1 U2.21 Y2.1 | length 4.8
  Top Layer w0.2: 17.817,8.185 17.817,7.62 18.675,6.763 18.675,6.7 19.105,6.27 Y2.1@19.345,6.27 ; 17.837,8.205 18.036,8.404 18.036,8.996 U2.21 ; 19.345,4.989 Y2.1@19.345,6.161
RF1: C21.2 L1.1 U2.14 | length 6.1
  Top Layer w0.2: C21.2 12.85,7.338 12.85,9.475 14.096,10.721 U2.14 ; 13.075,6.439 C21.2@13.075,7.184
SCK: U2.1 U6A.4 U6B.4 | length 32.2
  Top Layer w0.2: v3(17.725,17.375) 18.2,17.375 19.786,15.789 19.786,14.421 ; U2.1 19.561,14.196 19.786,14.421 ; v3(21.693,14.472) 21.664,14.443 21.558,14.443 21.535,14.421 19.786,14.421 ; U6A.4 38.426,7.863 38.975,8.411 v3(38.975,9.875)
  Bottom Layer w0.2: U6B.4 14.139,16.573 14.3,16.734 14.3,16.773 14.927,17.4 17.7,17.4 v3(17.725,17.375) ; v3(21.693,14.472) 25.453,14.472 30.225,9.7 38.783,9.7 38.958,9.875 v3(38.975,9.875)
SCL: U2.8 U4.4 U5.23 | length 16.5
  Top Layer w0.2: U2.8 16.061,14.738 16.948,15.625 18.609,15.625 18.684,15.55 v3(18.725,15.55)
  Bottom Layer w0.2: U5.23@19.437,11.987 U5.23 19.437,12.241 19.425,12.253 19.425,13.423 18.725,14.123 v3(18.725,15.55) 18.766,15.55 18.866,15.65 19.843,15.65 21.496,13.997 23.164,13.997 25.682,11.479 U4.4
SD: U2.12 U6A.6 U6B.6 | length 34.5
  Top Layer w0.2: v3(13.226,13.147) 13.226,13.107 13.478,12.854 13.478,12.587 14.294,11.771 14.944,11.771 14.969,11.746 15.336,11.746 U2.12 ; v3(36.85,10.225) 37.5,9.575 37.5,8.697 U6A.6
  Bottom Layer w0.2: v3(13.226,13.147) 13.226,15.706 U6B.6@13.241,15.721 ; v3@13.241,13.147 13.267,13.147 13.438,13.319 13.444,13.319 16.15,16.025 24.6,16.025 30.375,10.25 36.825,10.25 v3(36.85,10.225)
SDA: U2.7 U4.3 U5.24 | length 15
  Top Layer w0.2: U2.7 16.54,13.942 16.54,14.793 16.973,15.225 18.372,15.225 18.837,14.76 19.282,14.76 v3(19.311,14.731)
  Bottom Layer w0.2: v3(19.311,14.731) 19.837,14.205 ; U5.24 19.837,14.11 19.837,14.205 ; U4.3 26.332,11.329 26.197,11.194 26.18,11.194 25.94,10.954 24.483,10.954 21.74,13.697 20.345,13.697 19.932,14.11 19.837,14.205
SWCLK: P3.3 U2.5 | length 18.8
  Top Layer w0.2: U2.5 17.586,13.946 17.586,14.537 17.627,14.577 v3(17.627,14.618)
  Bottom Layer w0.2: P3.3 13.075,5.04 13.075,12.325 15.821,15.071 17.212,15.071 17.627,14.656 v3(17.627,14.618)
SWDIO: P3.2 U2.6 | length 18.7
  Top Layer w0.2: v3(17.015,14.596) 17.038,14.573 17.038,13.944 U2.6
  Bottom Layer w0.2: v3(17.015,14.596) 15.871,14.596 13.375,12.1 13.375,6.475 18.105,1.745 18.91,1.745 P3.2
VDD: C9.1 C11.1 C12.1 C13.1 C14.1 C15.1 C16.1 C27.1 C31.1 C32.1 C33.1 C34.1 C36.1 C37.1 P3.1 U1.13 U2.13 U2.15 U2.24 U2.25 U2.27 U2.29 U2.32 U3.6 U3.7 U3.8 U3.9 U4.2 U4.6 U4.8 U5.8 U5.13 U5.22 U6A.2 U6A.5 U6B.5 | length 49.5
  Top Layer w0.3: C12.1@13.325,12.2 13.325,11.65 13.625,11.35 13.7,11.35 13.775,11.275 C11.1 ; 14.013,11.221 14.375,11.221 v2(14.4,11.246) ; C13.1 C14.1 14.175,9.784 14.525,10.134 v2(14.525,10.175) 14.552,10.202 U2.15@15.111,10.202 ; v2@14.4,11.225 14.402,11.223 15.359,11.223 U2.13 ; U2.24 20.796,9.021 21.291,9.516 ; U2.27 21.19,10.721 21.652,10.258 21.652,9.76 21.524,9.632 v2(21.524,9.591) ; U2.29 21.248,11.721 21.694,11.275 C16.1 22.375,11.461 22.383,11.469 22.383,12.144 C27.1 ; U2.32@20.286,13.246 21.409,13.246 21.482,13.172 v2(21.523,13.172) ; U2.25@20.511,9.696 20.691,9.516 21.291,9.516 ; v2@21.496,13.241 21.496,13.24 21.592,13.143 21.608,13.143 22.458,12.294 C27.1 ; v2@21.504,9.66 21.504,9.611 21.408,9.516 21.291,9.516 ; v2@21.593,9.62 21.593,9.591 22.266,9.591 C15.1 ; C27.1@22.458,12.144 C27.1 ; U3.9 v2(26.6,1.2) ; U3.8 v2(26.625,2.25) ; U3.7 v2(26.6,3.35) ; U3.6 24.787,4.437 26.612,4.437 v2(26.625,4.45) ; U1.13 28.739,15.15 29.14,15.55 v2(29.175,15.55) ; v2(35.7,7.825) 35.719,7.844 36.569,7.844 U6A.2 ; v2@37.778,10.672 C37.1 38.388,10.581 U6A.5
  Bottom Layer w0.3: U6B.5 14.211,15.862 14.412,15.862 v2(15.1,16.55) 15.141,16.55 15.34,16.75 C36.1 ; v2(14.525,10.175) 15.645,10.175 16.158,9.662 16.158,9.508 C34.1 17.255,9.433 U5.13 ; v3(18.175,14.75) 18.175,13.87 19.037,13.007 U5.22 ; U5.8@19.45,8.866 19.45,8.533 20.433,7.55 C33.1 20.737,7.862 21.524,8.649 v2(21.524,9.591) ; U4.6 26.332,7.918 C32.1 ; U4.2 27.007,11.379 27.007,10.911 27.096,10.822 27.096,10.654 v2(27.125,10.625) ; U4.8 27.641,9.345 27.641,8.684 v2(27.65,8.675) 27.65,7.887 C31.1 ; v2(29.175,15.55) 29.905,16.28 30.991,16.28 31.786,15.485 31.786,15.293 32.139,14.94 C9.1
  other v2: 26.332,8.636 37.775,10.675
WS: U2.10 U6A.1 U6B.1 | length 34
  Top Layer w0.2: v3(12.725,14.1) 13.247,14.1 14.334,13.013 14.652,13.013 ; v3(14.027,14.573) 14.027,14.533 14.652,13.908 14.652,13.013 ; U2.10 15.053,12.721 14.761,13.013 14.652,13.013 ; v3@29.61,11.715 30.15,11.175 35.025,11.175 36.587,9.613 U6A.1
  Bottom Layer w0.2: U6B.1@12.3,15.917 12.3,14.525 v3(12.725,14.1) ; v3(14.027,14.573) 15.778,16.325 25,16.325 v3(29.6,11.725)
pads on no net: U1.8 U1.20 U1.23 U2.2 U2.3 U2.4 U2.9 U2.11 U2.18 U2.19 U2.22 U3.4 U3.5 U3.13 U3.14 U3.16 U3.17 U3.18 U5.1 U5.2 U5.3 U5.4 U5.5 U5.6 U5.7 U5.14 U5.15 U5.16 U5.17 U5.19 U5.20 U5.21

## Polygon pours and split planes (outlines as drawn)
GND on Bottom Layer "GND_L04_P001" (solid, pour order 1): 11.275,19.95 11.275,0 40.001,0 40.005,0.003 40.005,20 11.225,20
GND on Top Layer "GND_L01_P000" (solid, pour order 0): 11.275,0 11.275,20 40,20 40,0
GND on Int1 (GND) (split plane): 39.49,0.51 11.275,0.51 11.275,19.49 39.49,19.49
VDD on Int2 (PWR) (split plane): 39.49,0.51 11.275,0.51 11.275,19.49 39.49,19.49

## Other copper
Int1 (GND) (plane layer: these items are gaps in the copper):
  region: 0,20 11.275,20 11.275,0.5 10.775,0 0,0
Int2 (PWR) (plane layer: these items are gaps in the copper):
  region: 0,20 11.275,20 11.275,0.5 10.775,0 0,0

## Silkscreen, mask and mechanical layers (free items; w line width, h text height)
Top Overlay:
  text "GUAU" at 12.329,17.104 h1
  text "Gil_DeMiguel" at 11.7,15.667 h0.5
Bottom Overlay:
  drawing of 2 lines, arcs and shapes, not listed